# Altium PCB Toggle.PcbDoc
Units mm, origin at the board's own origin, x right, y up, seen from the top; angles counter-clockwise.
Board outline 20 x 20 mm, 2 copper layers (Top Layer, Bottom Layer), stack 1.58 mm thick; 2 components, 3 nets, 10 pads, 0 vias.
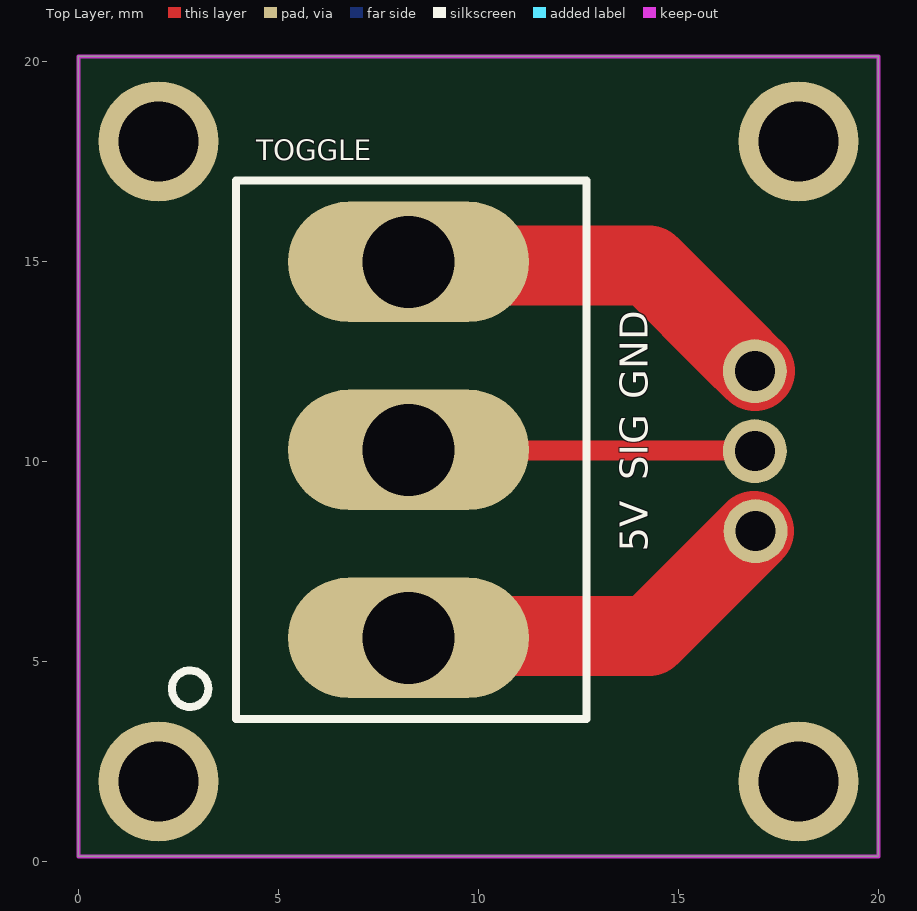
[diagram p0: Top Layer view]
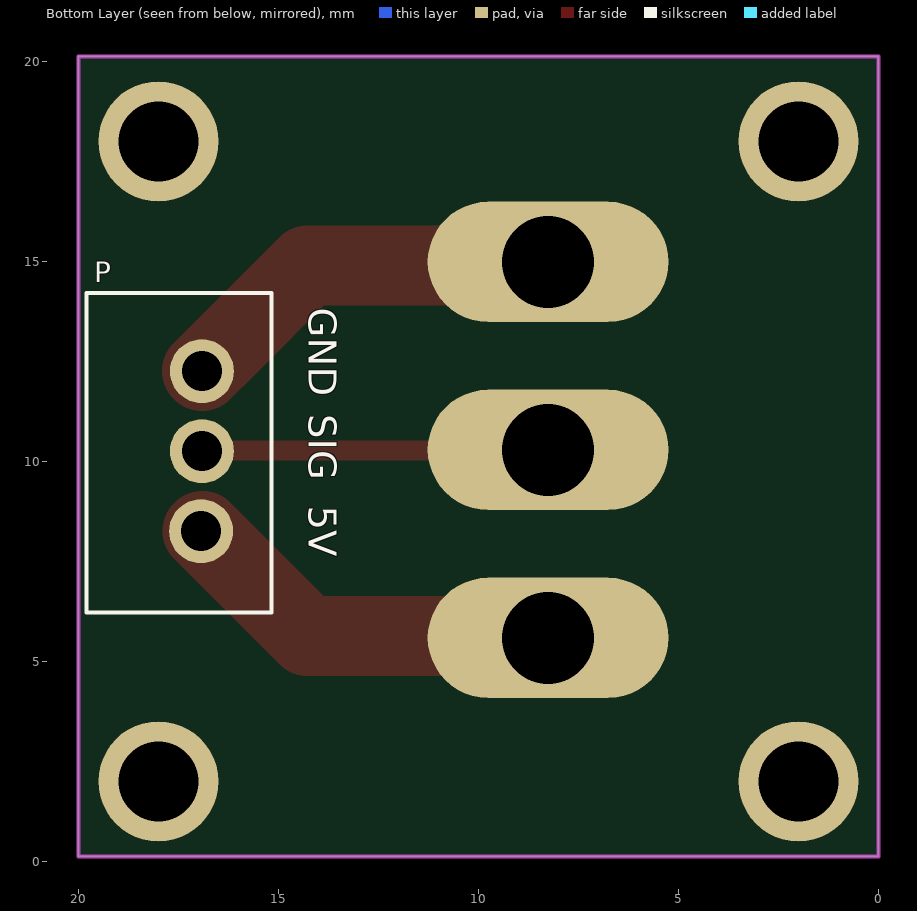
[diagram p1: Bottom Layer view, seen from below]

## Layer stack, top to bottom
Top Solder: solder mask 0.0102, Solder Resist, Dk 3.5
Top Layer: signal copper 0.0356
Dielectric 1: dielectric 1.509, FR-4, Dk 4.8
Bottom Layer: signal copper 0.0356
Bottom Solder: solder mask 0.0102, Solder Resist, Dk 3.5

## Board outline
0,0.127 20,0.127 20,20.127 0,20.127

## Design rules (kind name [scope] priority, off if disabled: settings)
Clearance [All] p1: gap=0.15 ignorepadtopadclearanceinfootprint=FALSE
ComponentClearance [All] p1 off: gap=0.254 collisioncheckmode=3 verticalgap=2540 showdistances=FALSE
Height [All] p1: minheight=0 maxheight=100 prefheight=12.7
HoleSize [All] p1 off: absolutevalues=TRUE maxlimit=2.54 minlimit=0.025 maxpercent=80.000 minpercent=20.000
HoleToHoleClearance [All] p1 off: gap=0.254 allowstackedmicrovias=TRUE
MinimumSolderMaskSliver [All] p1 off: minsoldermaskwidth=0.254
PolygonConnect [All] p1: thpad.connectstyle=Relief thpad.reliefconductorwidth=0.254 thpad.reliefentries=4 thpad.polygonreliefangle="90 Angle" thpad.airgapwidth=0.254 smdpad.connectstyle=Relief smdpad.reliefconductorwidth=0.254 smdpad.reliefentries=4 smdpad.polygonreliefangle="90 Angle" smdpad.airgapwidth=0.254 via.connectstyle=Direct via.reliefconductorwidth=0.254 via.reliefentries=4 via.polygonreliefangle="90 Angle" via.airgapwidth=0.254
RoutingVias [All] p1: holewidth=0.3 width=0.5 viastyle="Through Hole" minholewidth=0.2 minwidth=0.4 maxholewidth=8 maxwidth=10
SilkToSilkClearance [All] p1 off: silktosilkclearance=0.254
SilkToSolderMaskClearance [IsPad] p1 off: minsilkscreentomaskgap=0.254 clearancetoexposedcopper=TRUE
SolderMaskExpansion SolderMaskExpansion_1 [IsVia] p1: expansion=0 soldermaskfromhole=TRUE
SolderMaskExpansion [All] p2: expansion=0.102
Width [All] p1: maxlimit=50 minlimit=0.2 preferedwidth=0.3
23 further rules are at their usual default settings.

## Components (designator, comment, footprint, x,y, rotation, side; value= is the part's Value field where it differs from the comment)
P "Header 3" B3B-PH-K-S(LF)(SN) 16.911,8.255 r90 bottom
TOGGLE "5636AB9" 320-916 8.255,10.287 r180 top

## Footprints (in the part's own frame and the unit in brackets; to place one, negate y for a bottom-side part, rotate by r counter-clockwise, add the part's x,y. Pads: shape width x height; smd on the part's side, far side on the other; paste and mask are expansions set on the pad)
320-916 [mil] "320-916"
  oval 237x118.5 / inner round 60 / far side oval 237x118.5 hole 90.55: 1(0,185.04) 2(0,0) 3(0,-185.04)
  silkscreen extent -175,-265 233,265, body extent -167,-260 167,260, height 1236
B3B-PH-K-S(LF)(SN) [mm]
  round 1.6 hole 1: 1(0,0.02) 2(2,0) 3(4,0)
  silkscreen extent -2.03,-1.74 5.96,2.88, body extent -1.99,-1.67 5.91,2.83, height 6

## Part data
P: "CONN HEADER VERT 3POS 2MM", Color=Natural, Contact Resistance=20mR, Current Rating=2A, Housing Color=White, Insulation Resistance=1MR, Manufacturer 1=JST, Manufacturer Part Number 1=B3B-PH-K-S(LF)(SN), Max Operating Temperature=85°C, Max Voltage Rating (AC)=100V, Min Operating Temperature=-25°C, Supplier Part Number 1=455-1705-ND, ComponentLink1Description=https://datasheet.ciiva.com/6747/80560-6747401.pdf?src-supplier=Newark, ComponentLink1URL=https://datasheet.ciiva.com/6747/80560-6747401.pdf?src-supplier=Newark, ComponentLink2Description=https://datasheet.ciiva.com/11746/0900766b80826550-11746939.pdf?src-supplier=RSComponents, ComponentLink2URL=https://datasheet.ciiva.com/11746/0900766b80826550-11746939.pdf?src-supplier=RSComponents, ComponentLink3Description=https://datasheet.ciiva.com/26894/getdatasheetpartid-448114-26894774.pdf?src-supplier=Verical, ComponentLink3URL=https://datasheet.ciiva.com/26894/getdatasheetpartid-448114-26894774.pdf?src-supplier=Verical, ComponentLink4Description=https://datasheet.ciiva.com/712/eph-712455.pdf?src-supplier=Digi-Key, ComponentLink4URL=https://datasheet.ciiva.com/712/eph-712455.pdf?src-supplier=Digi-Key, ComponentLink5Description=https://datasheet.ciiva.com/26924/getdatasheetpartid-651387-26924028.pdf?src-supplier=Verical, ComponentLink5URL=https://datasheet.ciiva.com/26924/getdatasheetpartid-651387-26924028.pdf?src-supplier=Verical, ComponentLink6Description=https://datasheet.ciiva.com/16200/eph-16200926.pdf?src-supplier=Future+Electronics, ComponentLink6URL=https://datasheet.ciiva.com/16200/eph-16200926.pdf?src-supplier=Future+Electronics, ComponentLink7Description=https://datasheet.ciiva.com/43491/741202-da-01-en-stiftleiste-gerade-3-pol-rm2-0-43491962.pdf?src-supplier=Conrad, ComponentLink7URL=https://datasheet.ciiva.com/43491/741202-da-01-en-stiftleiste-gerade-3-pol-rm2-0-43491962.pdf?src-supplier=Conrad, Connector Type="Male Pin", Contact Material=Brass,Tin, Contact Mating Length=0.13inch, Contact Plating=Tin,Copper, Depth=4.5mm, Fastening Type=Detent, Gender=Male, Height=9.4mm, Housing Material=Polyamide, LatestRevisionDate=17-Jul-2002, LatestRevisionNote="Re-released for DXP Platform.", Lead Free="Lead Free", Lead Pitch=2mm, Length=7.9mm, Max Current Rating=2A, Max Voltage Rating (DC)=100V, Mount="Through Hole", Number of Contacts=3, Number of Pins=3, Number of Poles=3, Number of Positions=3, Number of Rows=1, Orientation=Straight, Packaging=Bulk, Pitch=2mm, Pricing 1="1=0.19000, 10=0.18200, 100=0.12620, 500=0.10676, 1000=0.08736, 5000=0.07765, 10000=0.07037 (USD)", Publisher="Altium Limited", REACH SVHC="No SVHC", RoHS=Yes, Stock 1=143844, Supplier 1=Digi-Key, Termination=Solder, Voltage Rating=100V, Voltage Rating (AC)=100V, Width=4.5mm, Working Voltage=100V
TOGGLE: library part 320-916, "SWITCH TOGGLE SPDT 6A 125V", Case/Package=125, Contact Current Rating=4A, Contact Resistance=10mR, Manufacturer 1=APEM, Manufacturer Part Number 1=5636A9, Max Current Rating=6A, Max Operating Temperature=85°C, Max Voltage Rating (AC)=250V, Max Voltage Rating (DC)=30V, Min Operating Temperature=-40°C, Package Quantity=50, Supplier Part Number 1=642-5636A9, Voltage Rating (AC)=125V, Actuator Length=11.4mm, Actuator Material=Nylon,Polyamide,Brass, ComponentLink1Description=https://datasheet.ciiva.com/7986/94098-7986892.pdf?src-supplier=Element14, ComponentLink1URL=https://datasheet.ciiva.com/7986/94098-7986892.pdf?src-supplier=Element14, ComponentLink2Description=https://datasheet.ciiva.com/14142/03522208-14142796.pdf?src-supplier=Distrelec, ComponentLink2URL=https://datasheet.ciiva.com/14142/03522208-14142796.pdf?src-supplier=Distrelec, ComponentLink3Description=https://datasheet.ciiva.com/1533/1697793-1533110.pdf?src-supplier=Element14, ComponentLink3URL=https://datasheet.ciiva.com/1533/1697793-1533110.pdf?src-supplier=Element14, Contact Material=Silver, Current Rating=4A, Electrical Life=50000Cycles, Housing Material="Stainless Steel", Illumination Type=Non-Illuminated,Illuminated, Length=13.2mm, Mechanical Life=100000Cycles, Mount=Panel, Orientation=Straight, Packaging=Bulk, Pricing 1="1=8.04000, 25=7.62000, 50=7.19000, 100=6.98000, 250=5.92000, 500=5.71000 (USD)", REACH SVHC="No SVHC", RoHS=Yes, Stock 1=294, Supplier 1=Mouser, Switch Function=On-On, Termination=Solder, Throw Configuration=SPDT, Voltage Rating (DC)=30V

## Free pads (board coordinates)
  round 3 hole 2: ""(2,2) ""(2,18) ""(18,2) ""(18,18)

## Nets (pads, with @x,y where several pads share a name; then routed paths per layer and width w, separated by ;. In a path a pad name is that pad's centre, name@x,y a point inside that pad or via, vN(x,y) a via of type N, cw(c..) or ccw(c..) an arc to the next point about the centre after c; other vN are vias at no path point)
5V: P.1 TOGGLE.1 | length 9.7
  Top Layer w2: TOGGLE.1 8.297,5.629 14.265,5.629 16.341,7.705 P.1@16.891,8.255
GND: P.3 TOGGLE.3 | length 9.8
  Top Layer w2: TOGGLE.3 8.341,14.901 14.265,14.901 16.341,12.825 P.3
SIGNAL: P.2 TOGGLE.2 | length 8.7
  Top Layer w0.5: TOGGLE.2 8.271,10.271 15.771,10.271 16.895,10.271 P.2

## Keep-outs
Keep-Out Layer:
  the board outline again, w0.1

## Silkscreen, mask and mechanical layers (free items; w line width, h text height)
Top Overlay:
  text "GND" at 14.478,11.557 h1.2 r90
  text "SIG" at 14.478,9.525 h1.2 r90
  text "5V" at 14.478,7.747 h1.2 r90
Bottom Overlay:
  text "GND" at 14.478,13.843 h1.2 r90
  text "SIG" at 14.478,11.176 h1.2 r90
  text "5V" at 14.478,8.89 h1.2 r90